# EAGLE board fabkit02 (EAGLE 6.4)
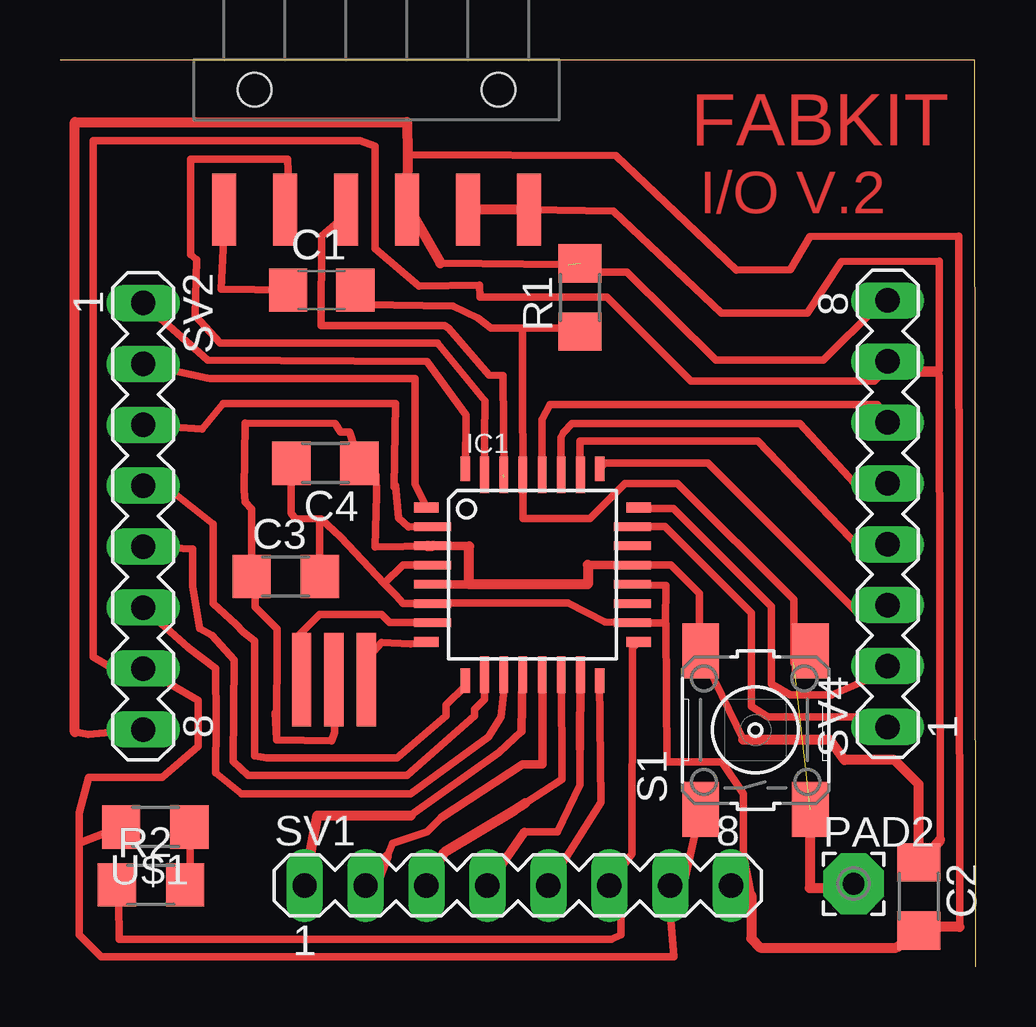
[diagram p0: board, top side]

Size 38.18 x 37.81 mm. Coordinates in mm from the lower left corner, seen from the top.
Outline: 38.18,0 38.13,37.81 0,37.81
Copper layers (1*16): Top 0.035mm / dielectric 1.5mm / Bottom 0.035mm
Design rules "default *": minimum track width 10mil, minimum drill 24mil, track to track 16mil, track to pad 16mil, pad to pad 16mil, via to via 16mil, smd to smd 16mil, copper to edge 16mil, drill to drill 8mil, minimum pad ring 10mil, minimum via ring 8mil, stop-mask expansion 4mil, vias tented up to drill 0mil, thermal gap 10mil

## Footprints (pad centres in the part's own frame; a part is rotated, then mirrored left to right if it is on the bottom)
C1206 = smd 1.6 x 1.8: 1 -1.4,0; 2 1.4,0
1206 = smd 1.6 x 1.803: 1 -1.422,0; 2 1.422,0
TQFP32-08 = smd 1.016 x 0.406: 1 -4.42,2.8; 8 -4.42,-2.8; 17 4.42,-2.8; 24 4.42,2.8 | smd 1.524 x 0.356: 2 -4.166,2; 3 -4.166,1.2; 4 -4.166,0.4; 5 -4.166,-0.4; 6 -4.166,-1.2; 7 -4.166,-2; 18 4.166,-2; 19 4.166,-1.2; 20 4.166,-0.4; 21 4.166,0.4; 22 4.166,1.2; 23 4.166,2 | smd 0.406 x 1.016: 9 -2.8,-4.42; 16 2.8,-4.42; 25 2.8,4.42; 32 -2.8,4.42 | smd 0.356 x 1.524: 10 -2,-4.166; 11 -1.2,-4.166; 12 -0.4,-4.166; 13 0.4,-4.166; 14 1.2,-4.166; 15 2,-4.166; 26 2,4.166; 27 1.2,4.166; 28 0.4,4.166; 29 -0.4,4.166; 30 -1.2,4.166; 31 -2,4.166
1X06-SMD = smd 1 x 3: 1 -6.35,5; 2 -3.81,5; 3 -1.27,5; 4 1.27,5; 5 3.81,5; 6 6.35,5 | hole 1.4: -5.08,0; 5.08,0
2,54/0,9 = drill 0.914 pad 2.54 octagon: 1 0,0
6MM_SWITCH = smd 2.286 x 1.524: 1 -3.302,2.286; 2 3.302,2.286; 3 -3.302,-2.286; 4 3.302,-2.286
MA08-1 = drill 1.016 long: 1 -8.89,0; 2 -6.35,0; 3 -3.81,0; 4 -1.27,0; 5 1.27,0; 6 3.81,0; 7 6.35,0; 8 8.89,0
EFOBM = smd 0.8 x 3.9: 1 -1.35,0; 2 0,0; 3 1.35,0

## Placement (x,y rotation side)
C1  .1uf  [C1206]  10.91,28.21 0 top
C2  1uf  [1206]  35.8,2.94 270 top
C3  .1uf  [1206]  9.41,16.28 0 top
C4  10uf  [1206]  11.06,21 180 top
IC1  ATMEGA48/88/168-AU  [TQFP32-08]  19.7,16.35 0 top
JP1  [1X06-SMD]  13.2,36.57 180 top
PAD2  WIREPAD2,54/0,9  [2,54/0,9]  33.08,3.47 0 top
R1  10k  [1206]  21.68,27.91 90 top
R2  499  [1206]  3.8,3.42 0 top
S1  [6MM_SWITCH]  28.99,9.88 90 top
SV1  [MA08-1]  19.09,3.4 0 top
SV2  [MA08-1]  3.47,18.79 270 top
SV4  [MA08-1]  34.51,18.89 90 top
U$1  [1206]  3.98,5.84 180 top
U$2  RESONATOREFOB  [EFOBM]  11.42,11.98 180 top

## Library data of the parts
C1 = rcl
C2-C4 R1 R2 S1 U$1 = ng
IC1 = atmega8
JP1 = SparkFun
PAD2 = wirepad
SV1 SV2 SV4 = con-lstb
U$2 = fab

## Nets
DTR: C1.1 JP1.6
GND: C2.1 C3.1 C4.1 IC1.3 IC1.5 IC1.21 JP1.1 JP1.2 S1.1 S1.2 SV1.7 SV2.7 SV4.7 U$1.2 U$2.2
MISO: IC1.16 SV1.5
MOSI: IC1.15 SV1.4
N$1: IC1.8 U$2.1
N$2: IC1.12 SV1.1
N$3: IC1.23 SV4.1
N$4: IC1.24 SV4.2
N$5: IC1.25 SV4.3
N$6: IC1.26 SV4.4
N$7: IC1.27 SV4.5
N$8: IC1.28 SV4.6
N$9: IC1.7 U$2.3
N$10: IC1.32 SV2.1
N$11: IC1.1 SV2.2
N$12: IC1.2 SV2.3
N$13: IC1.9 SV2.4
N$14: IC1.10 SV2.5
N$15: IC1.11 SV2.6
N$17: IC1.13 SV1.2
N$18: IC1.14 SV1.3
N$23: R2.2 U$1.1
RST: C1.2 IC1.29 PAD2.1 R1.1 S1.3 S1.4
RX: IC1.30 JP1.4
SCK: IC1.17 R2.1 SV1.6
TX: IC1.31 JP1.5
VCC: C2.2 C3.2 C4.2 IC1.4 IC1.6 IC1.18 IC1.20 JP1.3 R1.2 SV1.8 SV2.8 SV4.8

## Tracks (layer width: path | path; a pad name or v marks a point on that pad's centre or on a via)
DTR
  Top 0.305: JP1.6 6.77,31.47 6.82,30.35 6.72,28.27 C1.1
GND
  Top 0.305: IC1.3 13.14,17.5 13.2,19.71 13.17,20.52 C4.1 12.08,22.3 11.7,22.3 11.47,22.65 7.71,22.68 7.68,19.88 7.71,19.38 7.99,19.1 C3.1 8.45,15.82 8.14,15.52 8.14,15.01 9.06,14.09 9.03,9.47 | U$2.2 11.44,11.96 11.44,9.77 11.32,9.42 9.03,9.47 | 9.03,9.47 8.98,10.59 | 0.8,5.28 0.8,1.34 1.71,0.43 25.59,0.43 25.44,2.15 SV1.7 25.87,2.81 S1.1 | 0.8,5.28 0.8,6.42 1.21,7.89 4.25,7.89 5.75,9.19 5.75,11.12 SV2.7 3.7,12.06 2.4,12.31 1.38,12.92 1.38,34.44 12.51,34.44 13.14,34.21 13.14,29.94 14.97,28.39 17.49,28.42 17.51,27.94 22.8,27.94 26.3,24.43 33.95,24.43 34.28,24.76 | U$1.2 0.88,5.2 0.8,5.28 | 34.73,24.89 36.67,24.89 36.67,29.43 32.58,29.41 31.15,27.25 27.57,27.25 23.08,31.52 JP1.1 | 34.28,24.76 34.4,24.89 34.73,24.89 | 34.28,24.76 36.61,24.76 36.67,24.61 36.69,5.3 | 34.73,24.89 SV4.7 | IC1.21 25.47,16.75 26.66,15.57 26.66,12.59 S1.2 28.49,9.47
  Top 0.356: 17.06,17.55 15.33,17.55 | IC1.21 23.76,16.75 23.76,16.76 22.01,16.76 | 17.06,15.97 17.03,15.97 17.01,15.95 IC1.5
  Top 0.406: 22.01,16.76 22.01,15.95 17.11,15.95 17.08,15.97 17.06,15.97 | 15.33,17.55 15.3,17.55 | 17.06,15.97 17.06,17.55 | 17.06,15.97 17.06,15.95 | 15.33,17.55 | 15.33,17.55 15.35,17.55 | 15.35,17.55 IC1.3 | 15.35,17.55 | JP1.1 JP1.2 | 28.49,9.47 32.09,9.47 32.7,8.63 34.79,8.63 35.8,7.62 C2.1 35.7,4.14 36.69,5.3
MISO
  Top 0.305: SV1.5 22.54,6.85 IC1.16
MOSI
  Top 0.305: 19.37,5.63 20.74,5.63 21.68,7.59 21.67,9.08
  Top 0.356: SV1.4 19.37,5.63 | 21.67,9.08 IC1.15
N$1
  Top 0.305: IC1.8 14.62,13.48 13.4,13.53 12.72,12.75 U$2.1
N$2
  Top 0.305: 19.24,9.83 18.3,8.94 14.62,6.32 | IC1.12 19.3,12.07 19.29,12.06
  Top 0.356: 19.24,9.83 19.29,12.06
  Top 0.406: 10.53,2.81 SV1.1 10.73,6.32 14.62,6.32
N$3
  Top 0.305: IC1.23 25.22,18.35 28.82,14.75 28.82,10.87 29.5,10.43 34.35,10.43 SV4.1
N$4
  Top 0.305: SV4.2 34.33,12.26 32.17,11.35 30.44,11.35 29.65,11.81 29.65,15.03 25.57,19.12 24.15,19.12 IC1.24
  Top 0.406: IC1.24 24.07,19.15
N$5
  Top 0.305: SV4.3 33.21,14.8 27.01,21 22.73,21 IC1.25
N$6
  Top 0.305: 21.68,20.52 IC1.26 21.68,20.54 21.68,21.92 29.1,21.92 33.39,17.42 34.73,17.42 SV4.4
N$7
  Top 0.305: 20.9,21.13 20.92,21.13 | IC1.27 20.9,21.13 | 20.9,21.13 20.89,21.13 20.89,22.07 20.99,22.27 21.35,22.65 30.85,22.65 33.34,19.93 34.76,19.93 SV4.5
N$8
  Top 0.305: IC1.28 20.1,22.82 20.43,23.44 34.07,23.44 SV4.6
N$9
  Top 0.305: U$2.3 10.1,11.56 9.87,13.74 10.83,14.7 13.4,14.7 13.75,14.35 IC1.7
N$10
  Top 0.305: IC1.32 16.93,23.01 15.3,25.24 6.16,25.29 SV2.1
N$11
  Top 0.305: SV2.2 6.13,24.56 6.26,24.53 14.8,24.53 14.8,20.14 IC1.1
N$12
  Top 0.305: SV2.3 5.93,22.42 6.79,23.49 13.98,23.49 13.93,20.01 13.98,20.06 14.11,18.72 14.54,18.33 IC1.2
N$13
  Top 0.305: IC1.9 16.9,11.72 16.09,10.92 16.09,10.46 14.06,8.71 8.62,8.71 8.12,8.81 8.12,13.58 7.63,13.97 7.35,14.27 6.39,15.16 6.39,18.46 4.59,19.88 3.44,19.83 SV2.4
N$14
  Top 0.305: IC1.10 17.7,11.15 17.29,10.74 17.29,10.46 14.47,8 7.84,8 7.23,8.58 7.25,12.8 6.34,13.81 5.83,14.12 5.52,15.87 5.52,17.42 SV2.5
N$15
  Top 0.305: IC1.11 18.5,11.37 18.38,10.43 17.87,9.6 14.62,7.21 7.58,7.21 6.49,8.1 6.52,10.23 6.49,12.44 5.37,13.3 SV2.6
N$17
  Top 0.305: IC1.13 20.1,12.09 | 15.91,6.24 15.3,5.63 13.86,5.15 13.63,4.59
  Top 0.356: 20.1,12.09 20.1,8.45 19.29,8.45 15.91,6.24
  Top 0.406: SV1.2 13.32,3.78 13.63,4.59
N$18
  Top 0.305: IC1.14 20.92,7.82 19.39,6.83
  Top 0.406: SV1.3 16.04,4.8 18.94,6.52 19.39,6.83
N$23
  Top 0.305: U$1.1 5.47,2.79 R2.2
RST  (1 unrouted)
  Top 0.305: C1.2 12.71,28.27 12.66,27.61 16.4,27.55 17.44,27.05 17.97,26.64 19.24,26.64 | 19.24,26.64 21.53,26.64 R1.1 | 19.24,26.64 19.29,26.59 19.29,25.98 19.27,24 IC1.29 19.3,18.69 22.09,18.69 23.56,20.16 25.74,20.16 30.59,15.31 30.59,12.67 S1.4
  Top 0.406: S1.3 31.26,6.57 31.26,3.3 33.08,3.3 PAD2.1
RX  (1 unrouted)
  Top 0.305: 18.5,20.42 18.48,24.66 17.89,24.68 16.19,26.64 16.03,26.75 10.89,26.75 10.9,30.48 11.95,31.37 11.95,31.69
  Top 0.406: JP1.4 12.08,31.98 11.93,31.36 12.05,31.85 11.95,31.69
SCK
  Top 0.305: R2.1 2.45,2.71 2.48,1.16 23,1.16 23.38,1.34 23.38,2.59 SV1.6 23.84,4.72 23.86,12.26 23.86,13.3 IC1.17
TX
  Top 0.305: 9.56,31.67 9.49,33.68 5.45,33.68 5.45,29.69 5.7,29.48 5.63,27.15 6.67,26 15.74,26 17.72,23.59 17.7,22.07 IC1.31
  Top 0.406: 9.56,31.67 JP1.5
VCC  (1 unrouted)
  Top 0.305: IC1.20 25.26,15.9 25.24,14.37 25.11,14.35 | 25.11,14.35 IC1.18 22.72,14.38 21.17,15.18 15.53,15.18 IC1.6 14.29,15.15 14.01,15.49 13.5,16 | SV2.8 1.18,9.7 0.62,9.8 | 37.5,1.67 37.48,30.48 31.26,30.45 30.44,29.08 28.21,29.05 23.18,33.83 14.49,33.86 | 14.47,35.23 14.49,34.31 | IC1.4 14.31,16.75 13.5,16 | C4.2 9.64,18.92 9.79,18.69 10.89,18.68 | 10.89,18.68 11.7,17.93 13.5,16 | C3.2 10.83,18.62 10.89,18.68 | 28.64,3.14 SV1.8 28.82,2.99 28.49,4.69 28.49,7.21 27.6,8.56 25.31,8.56 25.26,14.3 25.11,14.35 | 15.86,29.33 21.04,29.28 21.07,29.26 | SV4.8 34.05,27.5 31.81,25.29 27.34,25.29 23.64,28.98 22.03,28.98 R1.2
  Top 0.406: 0.62,9.8 0.62,35.23 14.47,35.23 14.49,33.86 14.44,30.89 JP1.3 14.57,31.6 15.86,29.33 | 21.07,29.26 21.2,29.28 | 28.82,2.99 28.82,1.19 29.2,0.81 34.86,0.81 C2.2 35.88,1.67 37.5,1.67

## Text on the board
Top: FABKIT | I/O V.2